# EAGLE board espnative-deadrail-2-4 (EAGLE 7.6.0)

Size 50 x 20 mm. Coordinates in mm from the lower left corner, seen from the top.
Outline: 0,0 0,20 50,20 50,0 0,0
Copper layers (1*16): Top 0.035mm / dielectric 1.5mm / Bottom 0.035mm
Design rules "default": minimum track width 10mil, minimum drill 24mil, track to track 8mil, track to pad 8mil, pad to pad 8mil, via to via 8mil, smd to smd 8mil, copper to edge 40mil, drill to drill 8mil, minimum pad ring 10mil, minimum via ring 8mil, stop-mask expansion 4mil, vias tented up to drill 0mil, thermal gap 10mil

## Footprints (pad centres in the part's own frame; a part is rotated, then mirrored left to right if it is on the bottom)
JST-PH-2-SMT-RA = smd 1 x 4.6: 1 1,-3.7; 2 -1,-3.7 | smd 1.6 x 3.4: NC1 -3.4,1.5; NC2 3.4,1.5
C1206 = smd 1.6 x 1.8: 1 -1.4,0; 2 1.4,0
C0603 = smd 1.1 x 1: 1 -0.85,0; 2 0.85,0
FDSD0420 = smd 2.4 x 2.4: P$1 -2.1,0; P$2 2.1,0
SOT23 = smd 1 x 1.4: 1 -0.95,-1.1; 2 0.95,-1.1; 3 0,1.1
R0603 = smd 1 x 1.1: 1 -0.85,0; 2 0.85,0
SOT23-5L = smd 0.55 x 1.2: 1 -0.95,-1.3; 2 0,-1.3; 3 0.95,-1.3; 4 0.95,1.3; 5 -0.95,1.3
TSOT-26 = smd 0.7 x 1: 1 -0.95,-1.1; 2 0,-1.1; 3 0.95,-1.1; 4 0.95,1.1; 5 0,1.1; 6 -0.95,1.1
TSSOP-8 = smd 1.5 x 0.45: 1 -2.9,0.975; 2 -2.9,0.325; 3 -2.9,-0.325; 4 -2.9,-0.975; 5 2.9,-0.975; 6 2.9,-0.325; 7 2.9,0.325; 8 2.9,0.975
POLOLU-REGULATOR = drill 0.8 long: GND 4.064,1.27; VIN 6.604,1.27; VOUT 1.524,1.27
SOT23-6 = smd 0.55 x 1.2: 1 -0.95,-1.3; 2 0,-1.3; 3 0.95,-1.3; 4 0.95,1.3; 5 0,1.3; 6 -0.95,1.3
DIODE-1206 = smd 0.8 x 0.9: A 1.05,0; C -1.05,0
SOT143B = smd 1.2 x 1.44: 1 -0.75,-1.1 | smd 1 x 1.44: 2 0.95,-1.1; 3 0.95,1.1; 4 -0.95,1.1
DECODER-WIRE-PADS = smd 1.27 x 0.635: 1 0,3.81; 2 0,2.54; 3 0,1.27; 4 0,0; 5 0,-1.27; 6 0,-2.54; 7 0,-3.81
US8 = smd 0.3 x 0.8: 1 -0.75,-1.55; 2 -0.25,-1.55; 3 0.25,-1.55; 4 0.75,-1.55; 5 0.75,1.55; 6 0.25,1.55; 7 -0.25,1.55; 8 -0.75,1.55
ESP-12-TH = drill 0.8 offset: P1 -8.5,4.5; P2 -8.5,2.5; P3 -8.5,0.5; P4 -8.5,-1.5; P5 -8.5,-3.5; P6 -8.5,-5.5; P7 -8.5,-7.5; P8 -8.5,-9.5; P9 8.5,-9.5; P10 8.5,-7.5; P11 8.5,-5.5; P12 8.5,-3.5; P13 8.5,-1.5; P14 8.5,0.5; P15 8.5,2.5; P16 8.5,4.5

## Placement (x,y rotation side)
BAT  [JST-PH-2-SMT-RA]  3,4.44 90 top
C1  [C1206]  23,9 0 top
C2  [C1206]  23,4 90 top
C3  1 uF  [C0603]  6,15.5 0 top
C4  22uF  [C0603]  10.75,14.9 90 top
C5  22uF  [C1206]  1.5,11.5 90 top
C6  10n  [C0603]  47.17,33.63 90 top  (outside the outline)
L1  10uH  [FDSD0420]  9.56,11.05 180 top
Q1  BSS123  [SOT23]  31.49,8.16 270 top
Q2  BSS123  [SOT23]  31.49,12.54 270 top
Q3  BSS123  [SOT23]  35.84,6.96 0 top
Q4  BSS123  [SOT23]  35.54,13.04 180 top
Q5  BSS123  [SOT23]  25.42,6.17 90 top
R1  5k  [R0603]  80.48,35 90 top  (outside the outline)
R2  5k  [R0603]  80.48,40.08 90 top  (outside the outline)
R3  10k  [R0603]  74.13,37.54 90 top  (outside the outline)
R4  10k  [R0603]  80.48,24.84 90 top  (outside the outline)
R7  47k  [R0603]  43.84,9.58 0 top
R8  270k  [R0603]  93.18,35 90 top  (outside the outline)
R9  47k  [R0603]  80.48,29.92 90 top  (outside the outline)
R10  47k  [R0603]  66.51,40.08 90 top  (outside the outline)
R11  47k  [R0603]  74.13,24.84 90 top  (outside the outline)
R12  47k  [R0603]  74.13,31.19 90 top  (outside the outline)
R13  10k  [R0603]  44.76,49.06 90 top  (outside the outline)
R14  47k  [R0603]  61.27,49.06 90 top  (outside the outline)
R15  10k  [R0603]  26.98,49.06 90 top  (outside the outline)
R16  2k2  [R0603]  66.07,61.9 90 top  (outside the outline)
R17  10k  [R0603]  34.6,49.06 90 top  (outside the outline)
R18  10k  [R0603]  39.68,49.06 90 top  (outside the outline)
R19  500  [R0603]  66.35,49.06 90 top  (outside the outline)
R20  15k  [R0603]  31.93,33.63 90 top  (outside the outline)
R21  15k  [R0603]  37.01,33.63 90 top  (outside the outline)
R23  1k..5k  [R0603]  50.98,26.01 90 top  (outside the outline)
U$1  AP2112K-3V3  [SOT23-5L]  24.11,13.33 90 top
U$2  DMG6601-LVT  [TSOT-26]  39.56,8.19 90 top
U$3  DMG6601-LVT  [TSOT-26]  39.56,12 90 top
U$4  TPS2115A  [TSSOP-8]  17.54,11.4 270 top
U$5  POLOLU-VREG12  [POLOLU-REGULATOR]  13.34,8.43 270 bottom
U$6  LMR16006Y  [SOT23-6]  4.33,11.7 180 top
U$7  DIODE  [DIODE-1206]  8,14 180 top
U$8  STC4054  [SOT23-5L]  16.17,3.28 0 top
U$9  BAS3007A  [SOT143B]  1.83,17.04 180 top
U$10  DECODER-WIRE-PADS7  [DECODER-WIRE-PADS]  19.73,19.14 270 top
U$11  DIODE  [DIODE-1206]  10.37,8.12 180 top
U$12  TS5A3359  [US8]  43.37,13.72 270 top
X1  [ESP-12-TH]  37.15,9.91 90 bottom

## Library data of the parts
BAT = adafruit
C1-C6 R1-R4 R7-R21 R23 = rcl
L1 U$1-U$12 X1 = trainlib
Q1-Q5 = transistor-small-signal

## Nets
+3V3: R15.1 R17.1 R18.1 U$1.5 U$12.8 X1.P8
+4.1V: U$1.1 U$1.3 U$4.7
+5V: C4.1 L1.P$1 U$4.6 U$6.3 U$8.4
+12V: C2.2 R1.2 R2.2 U$2.2 U$3.2 U$5.VOUT U$10.4 U$11.C
BAT_EN: R14.1 U$4.2 X1.P4
CHRG_EN: Q5.1
CHRG_FB: R16.1 U$8.5 U$12.3
DCC_VPLUS: C5.2 U$6.5 U$9.4 U$11.A
F0_FRONT: Q3.1
F0_REAR: Q4.1
GND: BAT.2 C1.2 C2.1 C4.2 C5.1 C6.2 Q1.2 Q2.2 Q3.2 Q4.2 Q5.2 R8.2 R9.2 R10.2 R11.2 R12.1 R13.2 R14.2 R19.2 R23.2 U$1.2 U$2.5 U$3.5 U$4.3 U$4.5 U$5.GND U$6.2 U$7.C U$8.2 U$9.1 U$12.4 X1.P9
LIGHT_B: Q4.3 U$10.3
LIGHT_F: Q3.3 U$10.5
MOT_A: R21.2 U$2.4 U$2.6 U$10.6
MOT_B: R20.2 U$3.4 U$3.6 U$10.2
MOT_FB: C6.1 R20.1 R21.1 R23.1 U$12.1
MOTA_HIGH: Q1.1 R12.2
MOTA_LOW: R10.1 U$2.1
MOTB_HIGH: Q2.1 R11.1
MOTB_LOW: R9.1 U$3.1
N$1: U$12.7 X1.P2
N$2: R1.1 R3.1 U$2.3
N$3: Q2.3 R4.2
N$4: R2.1 R4.1 U$3.3
N$5: C3.2 L1.P$2 U$6.6 U$7.A
N$6: Q1.3 R3.2
N$8: C3.1 U$6.1
N$11: Q5.3 R16.2
N$12: R17.2 U$12.6 X1.P12
N$17: R15.2 X1.P3
N$20: R18.2 U$12.5 X1.P11
N$21: R13.1 X1.P10
N$22: R19.1 U$4.4
TRK_L: U$9.2 U$10.7
TRK_R: U$9.3 U$10.1
VBAT: BAT.1 C1.1 R7.1 U$4.8 U$5.VIN U$8.3
VBAT_FB: R7.2 R8.1 U$12.2

## Tracks (layer width: path | path; a pad name or v marks a point on that pad's centre or on a via)
+3V3  (5 unrouted)
+4.1V  (2 unrouted)
+5V  (4 unrouted)
+12V  (7 unrouted)
BAT_EN  (2 unrouted)
CHRG_FB  (2 unrouted)
DCC_VPLUS  (3 unrouted)
GND  (31 unrouted)
LIGHT_B  (1 unrouted)
LIGHT_F  (1 unrouted)
MOT_A  (3 unrouted)
MOT_B  (3 unrouted)
MOT_FB  (4 unrouted)
MOTA_HIGH  (1 unrouted)
MOTA_LOW  (1 unrouted)
MOTB_HIGH  (1 unrouted)
MOTB_LOW  (1 unrouted)
N$1  (1 unrouted)
N$2  (2 unrouted)
N$3  (1 unrouted)
N$4  (2 unrouted)
N$5  (3 unrouted)
N$6  (1 unrouted)
N$8  (1 unrouted)
N$11  (1 unrouted)
N$12  (2 unrouted)
N$17  (1 unrouted)
N$20  (2 unrouted)
N$21  (1 unrouted)
N$22  (1 unrouted)
TRK_L  (1 unrouted)
TRK_R  (1 unrouted)
VBAT  (5 unrouted)
VBAT_FB  (2 unrouted)